# Altium PCB DIINproject.PcbDoc
Units mm, origin at the board's own origin, x right, y up, seen from the top; angles counter-clockwise.
Board outline 117.22 x 75.06 mm, 2 copper layers (Top Layer, Bottom Layer); 19 components, 24 nets, 100 pads, 0 vias.
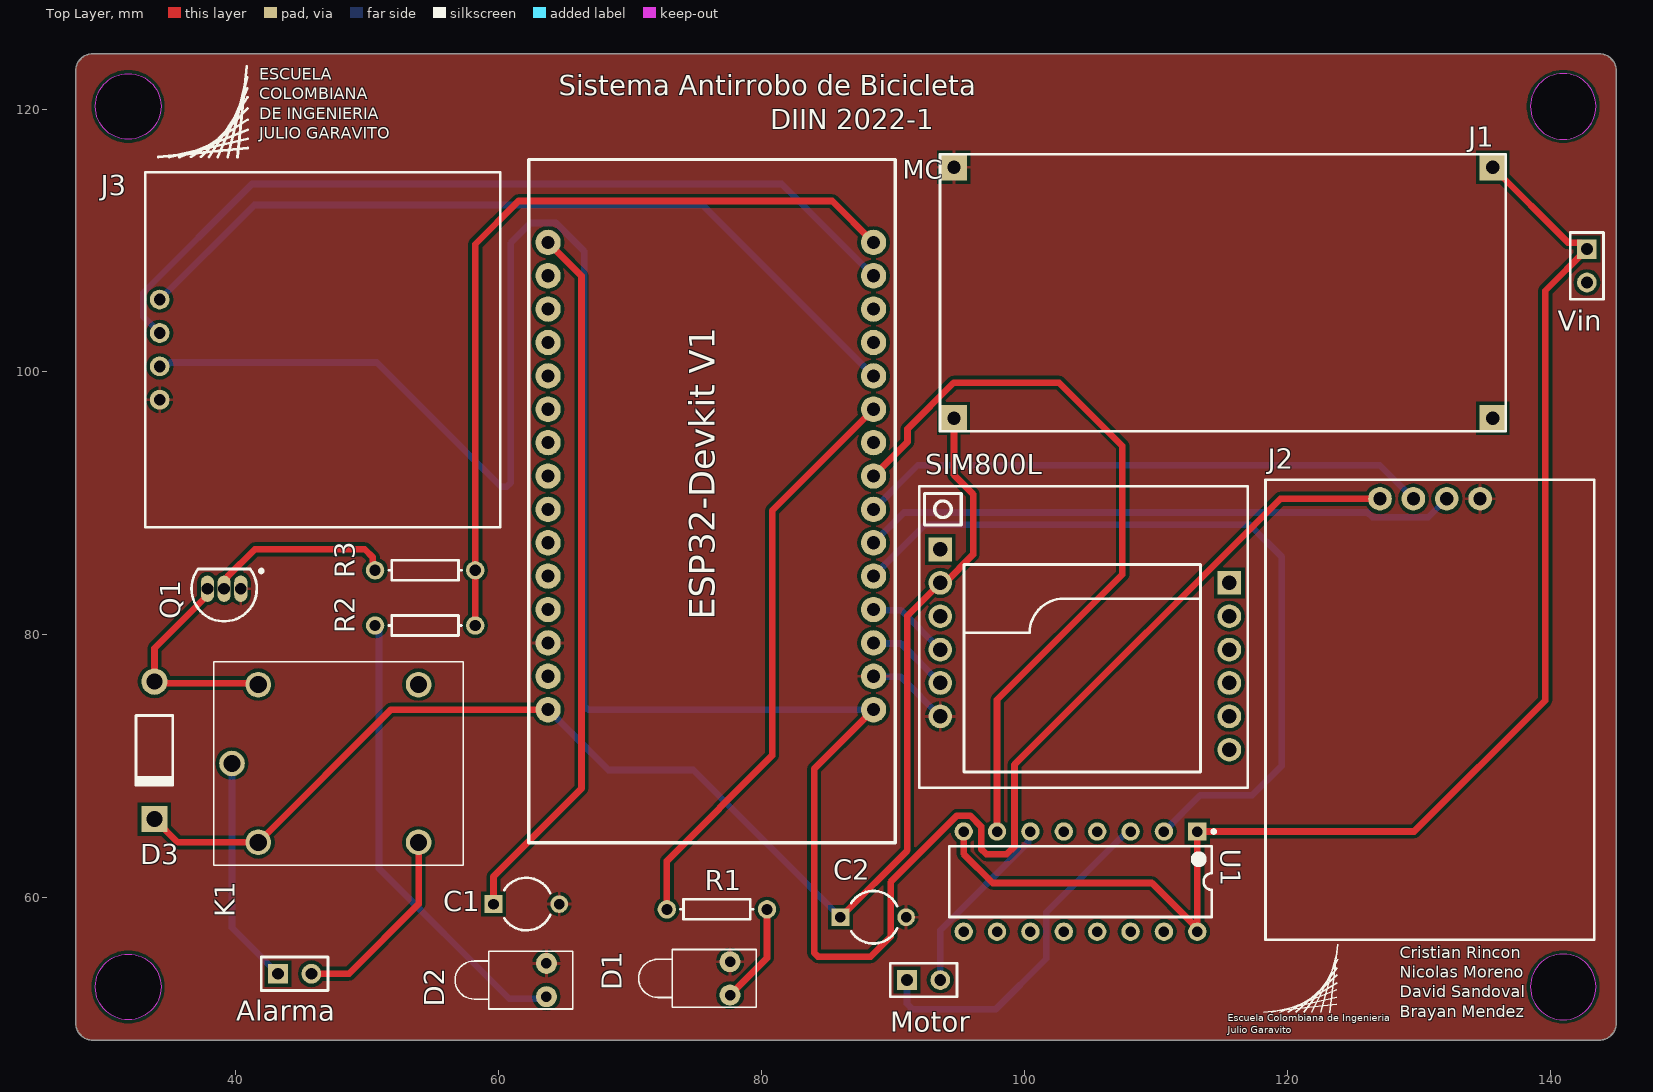
[diagram p0: Top Layer view]
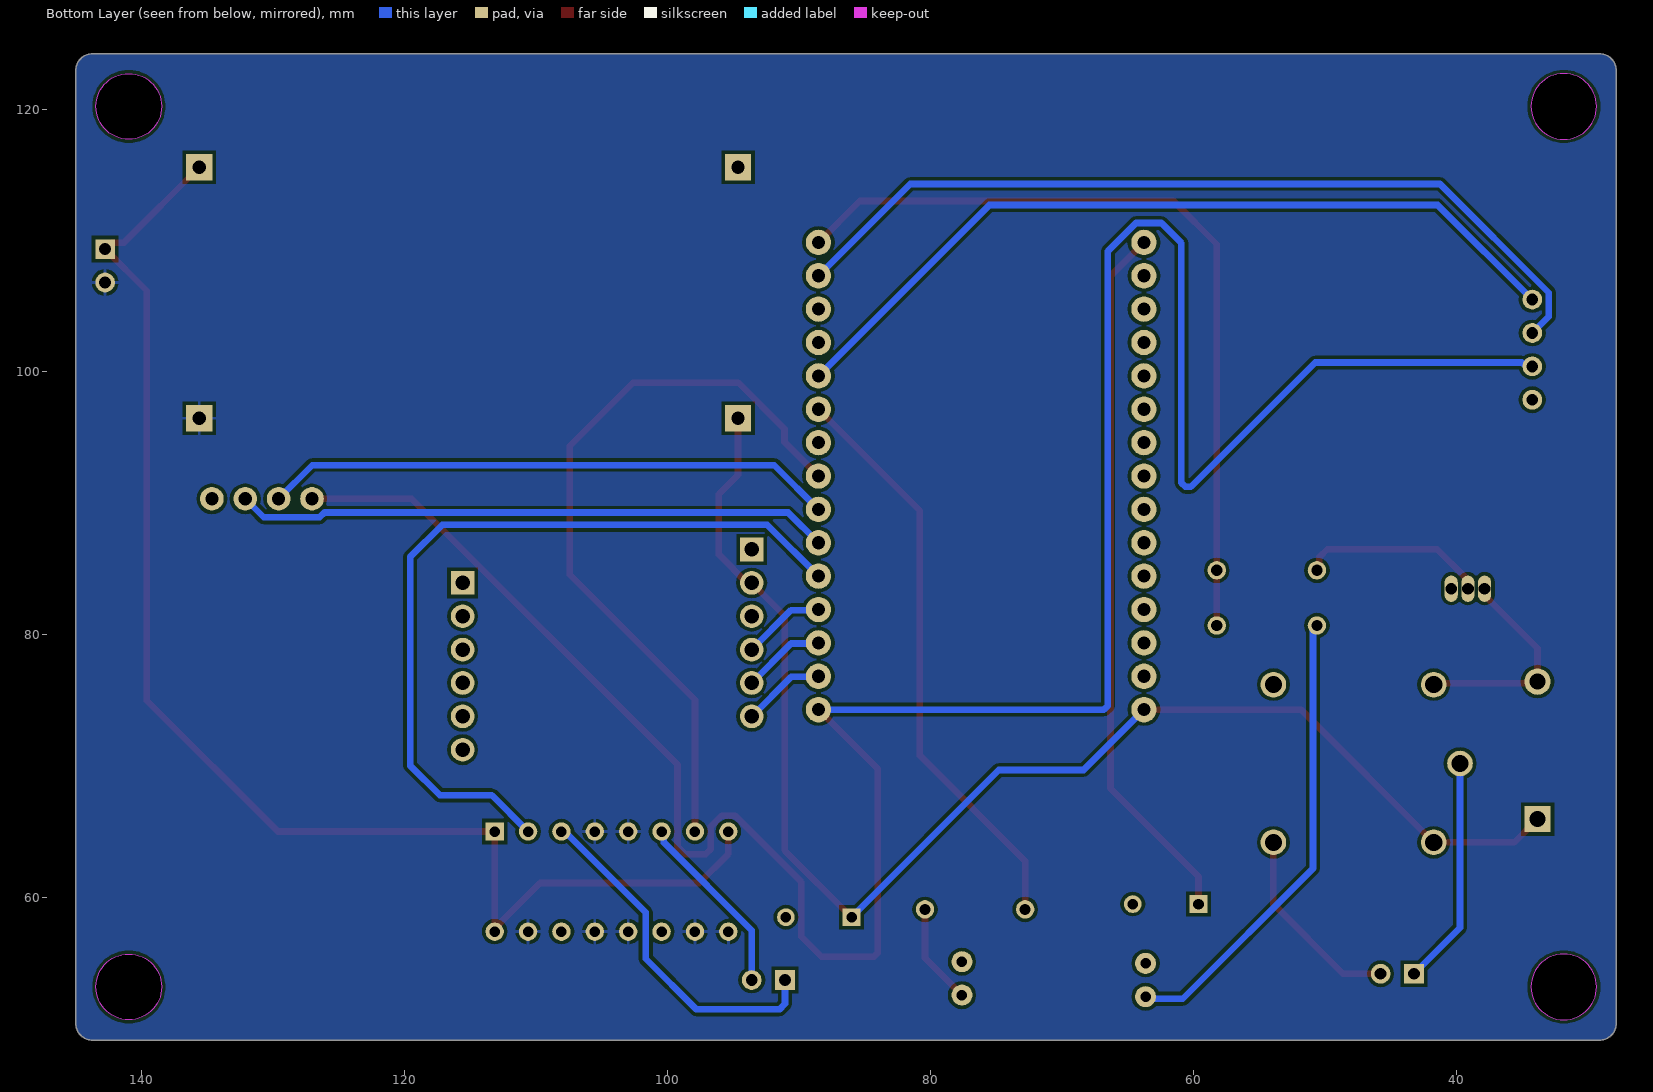
[diagram p1: Bottom Layer view, seen from below]

## Layer stack, top to bottom
Top Solder: solder mask 0.0102, Solder Resist, Dk 3.5
Top Layer: signal copper 0.0356
Dielectric 1: dielectric 0.32, FR-4, Dk 4.8
Bottom Layer: signal copper 0.0356
Bottom Solder: solder mask 0.0102, Solder Resist, Dk 3.5

## Board outline
27.813,50.419 27.813,122.936 cw(c29.083,122.936) 29.083,124.206 143.764,124.206 cw(c143.764,122.936) 145.034,122.936 145.034,50.419 cw(c143.764,50.419) 143.764,49.149 29.083,49.149 cw(c29.083,50.419)
cut-out: 138.5,53.2 ccw(c141,53.2) 141,50.7 ccw(c141,53.2) 143.5,53.2 ccw(c141,53.2) 141,55.7 ccw(c141,53.2)
cut-out: 138.5,120.2 ccw(c141,120.2) 141,117.7 ccw(c141,120.2) 143.5,120.2 ccw(c141,120.2) 141,122.7 ccw(c141,120.2)
cut-out: 31.8,117.7 cw(c31.8,120.2) 29.3,120.2 cw(c31.8,120.2) 31.8,122.7 cw(c31.8,120.2) 34.3,120.2 cw(c31.8,120.2)
cut-out: 31.8,50.7 cw(c31.8,53.2) 29.3,53.2 cw(c31.8,53.2) 31.8,55.7 cw(c31.8,53.2) 34.3,53.2 cw(c31.8,53.2)

## Design rules (kind name [scope] priority, off if disabled: settings)
Clearance [All] p1: gap=0.254 ignorepadtopadclearanceinfootprint=TRUE except(0: Arc-Hole Track-Hole SMDPad-Hole THPad-Hole Via-Hole Fill-Hole Poly-Hole Region-Hole Text-Hole)
PolygonConnect [All] p1: connectstyle=Relief reliefconductorwidth=0.254 reliefentries=4 polygonreliefangle="90 Angle" airgapwidth=0.254
RoomDefinition DIINproject [InComponentClass('DIINproject')] p1: confinementstyle=ConfineIn formatcopy=TRUE lockcomponents=FALSE outline 24.462,24.628 176.1,24.628 176.1,125.847 24.462,125.847
RoutingVias [All] p1: holewidth=0.711 width=1.27 viastyle="Through Hole" minholewidth=0.711 minwidth=1.27 maxholewidth=0.711 maxwidth=1.27
SolderMaskExpansion [All] p1: expansion=0.102 istentingtop=FALSE
UnRoutedNet [All] p1: checkbadconnections=TRUE
Width [All] p1: maxlimit=1 minlimit=0.254 preferedwidth=0.508
29 further rules are at their usual default settings.

## Components (designator, comment, footprint, x,y, rotation, side; value= is the part's Value field where it differs from the comment)
Alarma "Alarma" HDR1X2 43.2,54.2 r0 top
C1 "Cap2" CAPR5-4X5 62.1,59.5 r0 top value=10uF
C2 "Cap2" CAPR5-4X5 88.5,58.5 r0 top value=3300uF
D1 "LED1" LED-1 77.597,53.848 r180 top
D2 "LED1" LED-1 63.627,53.721 r180 top
D3 "Diode 1N4004" DO-41 33.8,71.2 r270 top
J1 "Reductor" Reductor 97.036,115.57 r270 top
J2 "NEO6M" NEO6M 125.349,58.293 r90 top
J3 "OLED" OLED 61.2,97.88 r180 top
K1 "JQC-3F-1C-24VDC" RELAY_JQC-3F-1C-24VDC 47.8,70.2 r180 top
MC "ESP32DEVKITV1" ESP32-DEVKITV1_3D 74.979,97.165 r90 top
Motor "Salida Motor" HDR1X2 91.059,53.721 r0 top
Q1 "2N3904" TO-92A 39.1,83.5 r90 top
R1 "Res1" AXIAL-0.3 76.6,59.1 r180 top value=330
R2 "Res1" AXIAL-0.3 54.4,80.7 r180 top value=330
R3 "Res1" AXIAL-0.3 54.4,84.9 r180 top value=3K
SIM800L "SIM800L" SIM800L 93.599,83.947 r0 top
U1 "L293D" STM-L293D-16 104.267,61.214 r270 top
Vin "Alimentacion 9V" HDR1X2 142.8,109.34 r270 top

## Footprints (in the part's own frame and the unit in brackets; to place one, negate y for a bottom-side part, rotate by r counter-clockwise, add the part's x,y. Pads: shape width x height; smd on the part's side, far side on the other; paste and mask are expansions set on the pad)
AXIAL-0.3 [mm] "Axial Device, Thru-Hole; 2 Leads; 0.3 in Pin Spacing"
  round 1.4 hole 0.85: 1(-3.81,0) 2(3.81,0)
  silkscreen extent -2.77,-0.76 2.77,0.76
CAPR5-4X5 [mm] "Capacitor; 2 Leads"
  rect 1.35x1.35 hole 0.8: 1(-2.5,0)
  round 1.35 hole 0.8: 2(2.5,0)
  silkscreen extent -1.69,-2 1.82,2
DO-41 [mm] "Diode, Axial; Body 5.2 x 2.7 mm (LxDia. max), Lead Dia. 0.86 mm (max)"
  round 2 hole 1.2: 1(-5.23,0)
  rect 2x2 hole 1.2: 2(5.23,0)
  silkscreen extent -2.65,-1.4 2.75,1.4
ESP32-DEVKITV1_3D [mm]
  round 1.93 hole 1: 1(-22.87,-13.54) 2(-20.33,-13.54) 3(-17.79,-13.54) 4(-15.25,-13.54) 5(-12.71,-13.54) 6(-10.17,-13.54) 7(-7.63,-13.54) 8(-5.09,-13.54) 9(-2.55,-13.54) 10(-0.01,-13.54) 11(2.53,-13.54) 12(5.07,-13.54) 13(7.61,-13.54) 14(10.15,-13.54) 15(12.69,-13.54) 16(12.69,11.23) 17(10.15,11.23) 18(7.61,11.23) 19(5.07,11.23) 20(2.53,11.23) 21(-0.01,11.23) 22(-2.55,11.23) 23(-5.09,11.23) 24(-7.63,11.23) 25(-10.17,11.23) 26(-12.71,11.23) 27(-15.25,11.23) 28(-17.79,11.23) 29(-20.33,11.23) 30(-22.87,11.23)
  silkscreen extent -33,-15.2 19,12.7, body extent -33,-15.14 17.93,13.36, height 12.75
HDR1X2 [mm] "Connector; Header; 2 Position"
  rect 1.5x1.5 hole 0.9: 1(0,0)
  round 1.5 hole 0.9: 2(2.54,0)
  silkscreen extent -1.27,-1.27 3.81,1.27
LED-1 [mm] "LED; 2 Leads"
  round 1.6 hole 0.8: 1(0,1.27) 2(0,-1.27)
  silkscreen extent -2,-2.2 6.95,2.2
NEO6M [mm]
  round 1.8 hole 1: 1(32.05,-1.71) 2(32.05,-4.25) 3(32.05,-6.79) 4(32.05,-9.33)
  silkscreen extent -1.5,-18 33.5,7
OLED [mm]
  round 1.5 hole 0.9: 1(27,0) 2(27,-2.54) 3(27,-5.08) 4(27,-7.62)
  silkscreen extent 1.1,-17.3 28.11,9.7
Reductor [mm]
  rect 2x2 hole 1: 1(0,38.6) 2(19.1,38.6) 3(19.1,-2.4) 4(0,-2.4)
  silkscreen extent -1,-3.46 20.1,39.6
RELAY_JQC-3F-1C-24VDC [mm]
  round 1.95 hole 1.3: COIL1(6.1,6) COIL2(6.1,-6) COM(8.1,0) NC(-6.1,-6) NO(-6.1,6)
  silkscreen extent -9.5,-7.75 9.5,7.75, body extent -9.35,-7.62 9.65,7.88, height 15.5
SIM800L [mm]
  rect 1.8x1.8 hole 1.1: 1(0,2.54) 12(22,0)
  round 1.8 hole 1.1: 2(0,0) 3(0,-2.54) 4(0,-5.08) 5(0,-7.62) 6(0,-10.16) 7(22,-12.7) 8(22,-10.16) 9(22,-7.62) 10(22,-5.08) 11(22,-2.54)
  silkscreen extent -1.6,-15.6 23.4,7.34, body extent -1.7,-15.5 23.32,7.5, height 3.28
STM-L293D-16 [mm] "DIP, 16-Leads, Body 20x6.85mm, Pitch 2.54mm"
  rect 1.4x1.4 hole 0.8: 1(-3.81,8.89)
  round 1.4 hole 0.8: 2(-3.81,6.35) 3(-3.81,3.81) 4(-3.81,1.27) 5(-3.81,-1.27) 6(-3.81,-3.81) 7(-3.81,-6.35) 8(-3.81,-8.89) 9(3.81,-8.89) 10(3.81,-6.35) 11(3.81,-3.81) 12(3.81,-1.27) 13(3.81,1.27) 14(3.81,3.81) 15(3.81,6.35) 16(3.81,8.89)
  silkscreen extent -3.93,-10 2.7,10.27, body extent -3.93,-10 3.93,10, height 5.1
TO-92A [mm] "TO, Flat Index; 3 In-Line, Axial Leads; Body Dia. 4.5mm; Leads 0.51 x 0.48 mm (max)"
  oval 2x1 hole 0.9: 1(0,-1.27) 2(0,0) 3(0,1.27)
  silkscreen extent -2.48,-2.96 1.5,2.48, body extent -2.48,-2.5 1.5,2.5, height 6.86

## Part data
Alarma Motor Vin: library part "Header 2", "Header, 2-Pin", LatestRevisionDate=17-Jul-2002, LatestRevisionNote="Re-released for DXP Platform.", Publisher="Altium Limited"
C1 C2: "Capacitor", PackageDescription="Capacitor; 2 Leads", PackageReference=CAPR5-4X5, Published=23-Sep-2002, Publisher="Altium Limited"
D1 D2: "Typical RED GaAs LED", LatestRevisionDate=08-Jul-2005, LatestRevisionNote="Mech Layer 1 removed.", PackageDescription="LED; 2 Leads", PackageReference=LED-1, Published=8-Jun-2000, Publisher="Altium Limited"
D3: "1 Amp General Purpose Rectifier", Code_JEDEC=DO-204-AL, ComponentLink1Description="Manufacturer Link", ComponentLink1URL=http://www.fairchildsemi.com/, ComponentLink2Description=Datasheet, ComponentLink2URL=http://www.fairchildsemi.com/ds/1N%2F1N4001.pdf, DatasheetVersion=1998, LatestRevisionDate=17-Jul-2002, LatestRevisionNote="Re-released for DXP Platform.", PackageDescription="Diode, Axial; Body 5.2 x 2.7 mm (LxDia. max), Lead Dia. 0.86 mm (max)", PackageReference=DO-41, PackageVersion=Aug-1999, Published=8-Jun-2000, Publisher="Altium Limited"
K1: "Miniature PCB Relay 24VDC, 10A 250VAC, 15A 125VAC, 10A 250VAC", Package=Package, Availability=Unavailable, Check_prices=https://www.snapeda.com/parts/JQC-3F-1C-24VDC/YUEQING%20HENGWEI%20ELECTRONICS%20CO.,LTD./view-part/4374405/?ref=eda, MF="YUEQING HENGWEI ELECTRONICS CO.,LTD.", MP=JQC-3F-1C-24VDC, Price=None, SnapEDA_Link=https://www.snapeda.com/parts/JQC-3F-1C-24VDC/YUEQING%20HENGWEI%20ELECTRONICS%20CO.,LTD./view-part/4374405/?ref=snap
MC: "Dual core, Wi-Fi: 2.4 GHz up to 150 Mbits/s,BLE (Bluetooth Low Energy) and legacy Bluetooth, 32 bits, Up to 240 MHz", Package=Package, Availability=Unavailable, Check_prices=https://www.snapeda.com/parts/ESP32%20DEVKIT%20V1/Do%20it/view-part/5659245/?ref=eda, MF="Do it", MP="ESP32 DEVKIT V1", Price=None, SnapEDA_Link=https://www.snapeda.com/parts/ESP32%20DEVKIT%20V1/Do%20it/view-part/5659245/?ref=snap
Q1: "NPN General Purpose Amplifier", ComponentLink1Description="Manufacturer Link", ComponentLink1URL=http://www.fairchildsemi.com/, ComponentLink2Description=Datasheet, ComponentLink2URL=http://www.fairchildsemi.com/ds/2N%2F2N3904.pdf, DatasheetVersion=1997, LatestRevisionDate=15-Jan-2003, LatestRevisionNote="PCB Footprint 'BCY-W3/D4.7' replaced", PackageDescription="TO, Flat Index; 3 In-Line, Axial Leads; Body Dia. 4.5mm; Leads 0.51 x 0.48 mm (max)", PackageReference=TO-92A, PackageVersion=Sep-1998, Published=8-Jun-2000, Publisher="Altium Limited"
R1 R2 R3: "Resistor", LatestRevisionDate=17-Jul-2002, LatestRevisionNote="Re-released for DXP Platform.", PackageDescription="Axial Device, Thru-Hole; 2 Leads; 0.3 in Pin Spacing", PackageReference=AXIAL-0.3, Published=8-Jun-2000, Publisher="Altium Limited"
U1: library part CMP-2000-06524-1, "Push-Pull Four Channel Driver with Diode, 4.5 to 36 V, -40 to 150 degC, 16-Pin PDIP, RoHS, Tube", Current - Output / Channel=600mA, Current - Peak Output=1.2A, Manufacturer=STMicroelectronics, On-State Resistance=-, Operating Temperature=-40°C~150°C, Package / Case="16-DIP(0.300\",7.62mm)", Package Description="16-Pin Thru-Hole Dual-In-Line, Body 20 x 6.85 mm, Pitch 2.54 mm", Package Reference=DIP-16, Standard Package=25, Supplier Device Package=16-PowerDIP, Voltage - Supply=4.5V~36V, Category=IntegratedCircuits(ICs), Datasheet URL=http://www.st.com/st-web-ui/static/active/en/resource/technical/document/datasheet/CD00000059.pdf, Datasheet Version=07/2003, Dynamic Catalog=HalfBridge, Family=PMIC-MOSFET,BridgeDrivers-InternalSwitch, Input Type=Non-Inverting, Manufacturer URL=http://www.st.com/, Mounting Technology=ThroughHole, Mounting Type=ThroughHole, Number of Outputs=4, Other Names=497-2936-5, Other Related Documents=L293DViewAllSpecifications, Packaging=Tube, PartNumber=L293D, Series=-, Type=HalfBridge

## Nets (pads, with @x,y where several pads share a name; then routed paths per layer and width w, separated by ;. In a path a pad name is that pad's centre, name@x,y a point inside that pad or via, vN(x,y) a via of type N, cw(c..) or ccw(c..) an arc to the next point about the centre after c; other vN are vias at no path point)
5V: C2.1 D3.2 J1.3 K1.COIL1 MC.30 SIM800L.2 | length 106.6
  Top Layer w0.508: D3.2 35.57,64.2 K1.COIL1 51.795,74.295 MC.30 ; C2.1 91.09,63.59 91.09,81.438 SIM800L.2 93.947,83.947 96.1,86.1 96.1,90.7 94.636,92.164 J1.3
  Bottom Layer w0.508: MC.30 68.344,69.7 74.8,69.7 C2.1
"Alimetacion motor +": J1.1 U1.1 U1.8 U1.16 Vin.1 | length 105.5
  Top Layer w0.508: U1.8 95.377,63.323 97.59,61.11 109.697,61.11 112.587,58.22 112.587,58.215 U1.16@113.157,57.645 ; U1.16 U1.16@113.157,57.645 ; J1.1 141.37,109.836 142.304,109.836 Vin.1 139.63,106.17 139.63,75 129.654,65.024 U1.1 U1.16@113.157,57.645
"Control Alarma": MC.15 R2.1 R3.1 | length 62
  Top Layer w0.508: R2.1 R3.1 58.21,109.71 61.5,113 85.374,113 MC.15
GND: C1.2 C2.2 D1.2 D2.2 J1.4 J2.4 J3.1 MC.2 MC.28 Q1.1 SIM800L.6 | length 6.3
  Bottom Layer w0.508: MC.2 88.564,76.79 90.596,76.79 SIM800L.6
GNDMOTOR: J1.2 U1.4 U1.5 U1.9 U1.10 U1.12 U1.13 U1.15 Vin.2
Motor_In1: MC.5 U1.2 | length 60.6
  Bottom Layer w0.508: MC.5 92.434,88.37 117.14,88.37 119.59,85.92 119.59,70.04 117.33,67.78 113.373,67.78 U1.2
Motor_In2: MC.8 U1.7 | length 57.7
  Top Layer w0.508: MC.8 91.108,94.664 91.108,95.661 94.618,99.17 102.64,99.17 107.45,94.36 107.45,84.579 97.917,75.046 U1.7
NetAlarma_1: Alarma.1 K1.COM | length 17.4
  Bottom Layer w0.508: K1.COM 39.7,57.7 Alarma.1
NetAlarma_2: Alarma.2 K1.NO | length 15.1
  Top Layer w0.508: Alarma.2 48.6,54.2 53.9,59.5 K1.NO
NetC1_1: C1.1 MC.16 | length 54.2
  Top Layer w0.508: C1.1 59.6,61.6 66.3,68.3 66.3,107.304 MC.16
NetD1_1: D1.1 R1.1 | length 7.7
  Top Layer w0.508: D1.1 80.41,55.391 R1.1
NetD2_1: D2.1 R2.2 | length 35.5
  Bottom Layer w0.508: R2.2 50.89,80.4 50.89,62.21 60.8,52.3 63.476,52.3 D2.1
NetD3_1: D3.1 K1.COIL2 Q1.3 | length 16.7
  Top Layer w0.508: Q1.3 37.83,83 33.8,78.97 D3.1 33.915,76.315 41.585,76.315 K1.COIL2
NetMC_10: MC.10 R1.2 | length 44.6
  Top Layer w0.508: R1.2 72.79,62.79 80.8,70.8 80.8,89.436 MC.10
NetMotor_1: Motor.1 U1.3 | length 26.7
  Bottom Layer w0.508: Motor.1 91.059,51.921 91.49,51.49 97.81,51.49 101.665,55.345 101.665,58.865 107.425,64.625 107.436,64.625 107.836,65.024 U1.3
NetMotor_2: Motor.2 U1.6 | length 14.1
  Bottom Layer w0.508: Motor.2 93.599,57.5 100.286,64.187 100.286,64.853 U1.6
NetQ1_2: Q1.2 R3.2 | length 14.3
  Top Layer w0.508: Q1.2 39.1,84.133 39.362,84.395 39.362,84.418 41.444,86.5 49.8,86.5 50.419,85.881 50.419,85.071 R3.2
RX: J2.2 MC.7 | length 43.5
  Bottom Layer w0.508: MC.7 91.884,92.9 127.042,92.9 J2.2
RXSIM: MC.4 SIM800L.4 | length 6.3
  Bottom Layer w0.508: MC.4 88.564,81.87 90.596,81.87 SIM800L.4
SCL: J3.3 MC.14 | length 65.5
  Bottom Layer w0.508: J3.3 32.942,104.218 32.942,106.021 41.221,114.3 81.534,114.3 MC.14
SDA: J3.4 MC.11 | length 62.7
  Bottom Layer w0.508: J3.4 41.4,112.7 75.514,112.7 MC.11
TX: J2.3 MC.6 | length 45.3
  Bottom Layer w0.508: MC.6 90.824,89.3 126.111,89.3 126.476,88.935 130.731,88.935 J2.3
TXSIM: MC.3 SIM800L.5 | length 6.3
  Bottom Layer w0.508: MC.3 88.564,79.33 90.596,79.33 SIM800L.5
Vcc: J2.1 J3.2 MC.1 | length 200.7
  Top Layer w0.508: MC.1 84,69.776 84,55.798 84.298,55.5 88.302,55.5 89.817,57.015 89.817,61.172 94.877,66.232 95.877,66.232 96.709,65.4 96.709,63.691 97.11,63.29 98.65,63.29 99.249,63.889 99.249,70.115 119.477,90.343 J2.1
  Bottom Layer w0.508: J3.2 34.2,100.718 34.308,100.61 34.886,100.61 34.994,100.718 50.719,100.718 60.182,91.255 60.602,91.255 60.9,91.552 60.9,109.8 62.428,111.328 64.359,111.328 66.5,109.187 66.5,74.593 66.798,74.295 MC.1
pads on no net: K1.NC MC.9 MC.12 MC.13 MC.17 MC.18 MC.19 MC.20 MC.21 MC.22 MC.23 MC.24 MC.25 MC.26 MC.27 MC.29 SIM800L.1 SIM800L.3 SIM800L.7 SIM800L.8 SIM800L.9 SIM800L.10 SIM800L.11 SIM800L.12 U1.11 U1.14

## Polygon pours and split planes (outlines as drawn)
GND on Top Layer "GND_L01_P000" (solid, pour order 0): 27.813,50.419 27.813,122.936 cw(c29.083,122.936) 29.083,124.206 143.764,124.206 cw(c143.764,122.936) 145.034,122.936 145.034,50.419 cw(c143.764,50.419) 143.764,49.149 29.083,49.149 cw(c29.083,50.419)
GNDMOTOR on Bottom Layer "GNDMOTOR_L02_P001" (solid, pour order 1): 27.813,50.419 27.813,122.936 cw(c29.083,122.936) 29.083,124.206 143.764,124.206 cw(c143.764,122.936) 145.034,122.936 145.034,50.419 cw(c143.764,50.419) 143.764,49.149 29.083,49.149 cw(c29.083,50.419)

## Silkscreen, mask and mechanical layers (free items; w line width, h text height)
Top Overlay:
  lines w0.1: 118.222,51.288 123.782,51.898 ; 118.782,51.288 123.782,52.418 ; 119.412,51.288 123.782,52.968 ; 120.032,51.278 123.802,53.508 ; 120.632,51.268 123.802,54.118 ; 121.242,51.268 123.822,54.658 ; 121.882,51.258 123.832,55.288 ; 122.562,51.268 123.822,55.878 ; 123.222,51.248 123.842,56.448
  lines w0.203: 34.095,116.348 40.905,117.038 ; 34.925,116.348 40.905,117.748 ; 35.705,116.338 40.895,118.428 ; 36.585,116.358 40.895,119.198 ; 37.345,116.368 40.885,120.038 ; 37.955,116.348 40.875,120.898 ; 38.605,116.348 40.865,121.588 ; 39.365,116.338 40.845,122.428 ; 40.115,116.338 40.815,123.258
  text "Sistema Antirrobo de Bicicleta" at 64.554,121.054 h1.52
  text "DIIN 2022-1" at 80.654,118.454 h1.52
  text "ESCUELA / COLOMBIANA / DE INGENIERIA / JULIO GARAVITO" at 41.76,117.43 h1.5
  text "Cristian Rincon / Nicolas Moreno / David Sandoval  / Brayan Mendez" at 128.55,50.59 h1.5
  text "Escuela Colombiana de Ingenieria / Julio Garavito" at 115.467,49.48 h0.9
Mechanical 1:
  circle w0.254: c31.8,120.2 r2.5
  circle w0.254: c31.8,53.2 r2.5
  circle w0.254: c141,53.2 r2.5
  circle w0.254: c141,120.2 r2.5
  lines w0.203: 27.813,50.419 ccw(c29.083,50.419) 29.083,49.149 143.764,49.149 ccw(c143.764,50.419) 145.034,50.419 145.034,122.936 ccw(c143.764,122.936) 143.764,124.206 29.845,124.206 29.083,124.206 ccw(c29.083,122.936) 27.813,122.936 27.813,50.419

## Text inside footprints (layer, text, board x,y; h text height)
MC: Top Overlay "ESP32-Devkit V1" at 76.454,81.153 h1.93 r90